# EAGLE board working (EAGLE 9.2.0)
REV: B
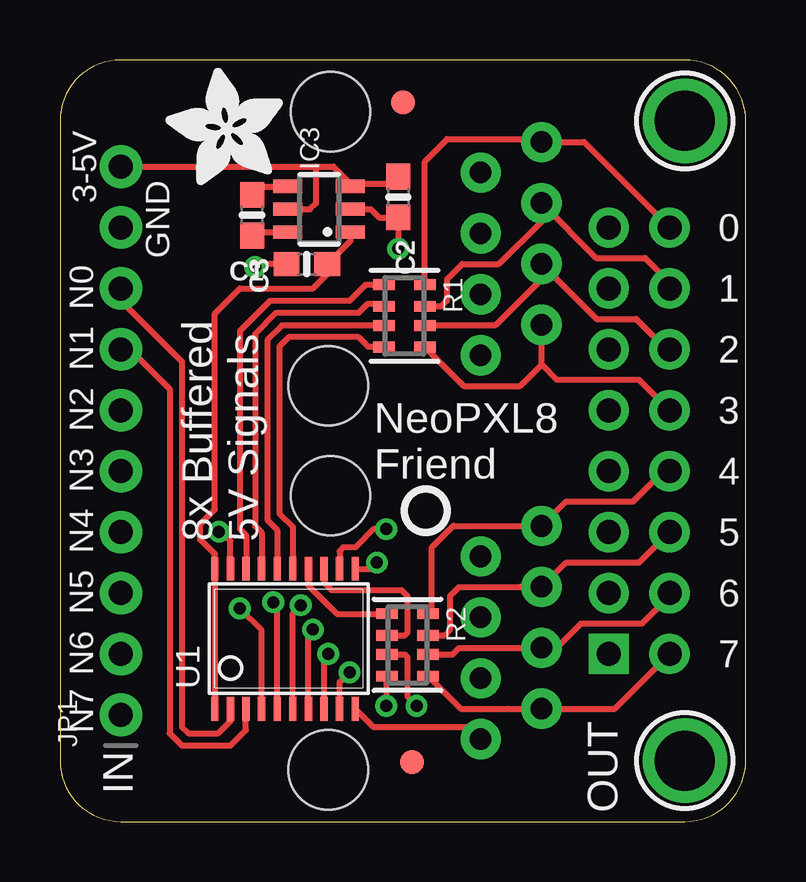
[diagram p0: board, top side]
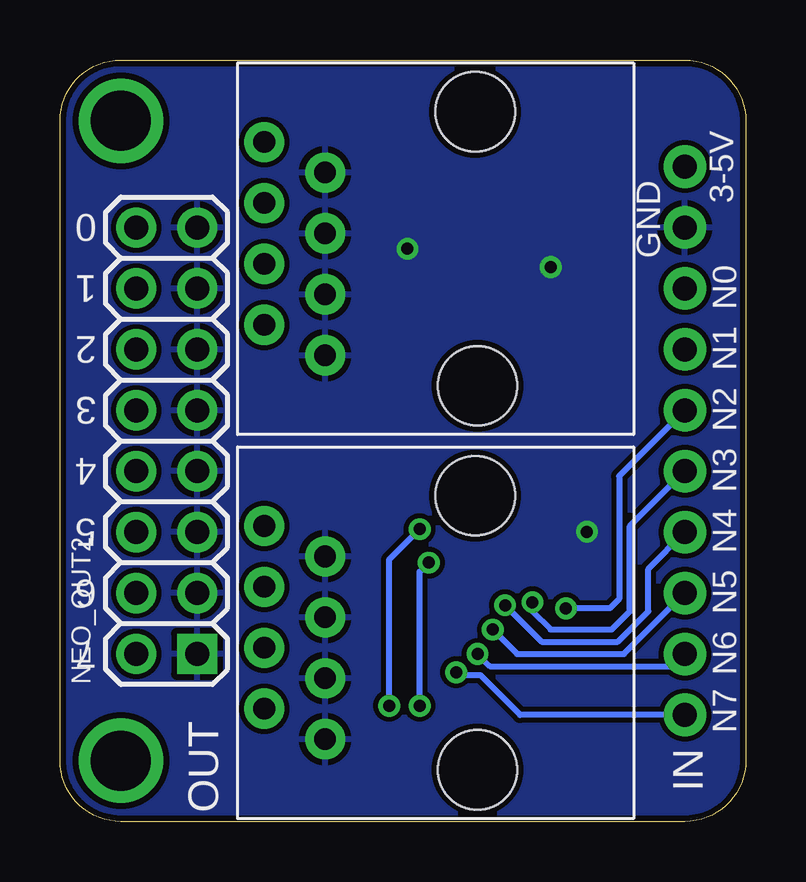
[diagram p1: board, bottom side, seen from below]

Size 28.57 x 31.75 mm. Coordinates in mm from the lower left corner, seen from the top.
Outline: 0,29.21 0,2.54 arc90 2.54,0 26.04,0 arc90 28.57,2.54 28.57,29.21 arc90 26.04,31.75 2.54,31.75 arc90 0,29.21
Copper layers (1*16): Top 0.035mm / dielectric 1.5mm / Bottom 0.035mm
Design rules "adafruit *": minimum track width 8mil, minimum drill 15.5mil, track to track 8mil, track to pad 8mil, pad to pad 8mil, via to via 8mil, smd to smd 8mil, copper to edge 10mil, drill to drill 8mil, minimum pad ring 10mil, minimum via ring 8mil, stop-mask expansion 2mil, vias tented up to drill 20mil, thermal gap 10mil

## Footprints (pad centres in the part's own frame; a part is rotated, then mirrored left to right if it is on the bottom)
0603-NO = smd 1.075 x 1: 1 -0.85,0; 2 0.85,0
RJ45_VERTICAL_UNSHIELDED = drill 0.9 pad 1.676: 1 -4.44,6.35; 2 -3.17,8.89; 3 -1.9,6.35; 4 -0.63,8.89; 5 0.64,6.35; 6 1.91,8.89; 7 3.18,6.35; 8 4.45,8.89 | hole 3.302: -5.715,0; 5.715,0.1
FIDUCIAL_1MM = smd 1 x 1: 1 0,0
SOT23-6 = smd 0.55 x 1.2: 1 -0.95,-1.3; 2 0,-1.3; 3 0.95,-1.3; 4 0.95,1.3; 5 0,1.3; 6 -0.95,1.3
1X10_ROUND70 = drill 1 pad 1.778: 1 -11.43,0; 2 -8.89,0; 3 -6.35,0; 4 -3.81,0; 5 -1.27,0; 6 1.27,0; 7 3.81,0; 8 6.35,0; 9 8.89,0; 10 11.43,0
2X08 = drill 1 pad 1.676 square: 1 -8.89,-1.27 | drill 1 pad 1.676: 2 -8.89,1.27; 3 -6.35,-1.27; 4 -6.35,1.27; 5 -3.81,-1.27; 6 -3.81,1.27; 7 -1.27,-1.27; 8 -1.27,1.27; 9 1.27,-1.27; 10 1.27,1.27; 11 3.81,-1.27; 12 3.81,1.27; 13 6.35,-1.27; 14 6.35,1.27; 15 8.89,-1.27; 16 8.89,1.27
RESPACK_4X0603 = smd 0.45 x 0.9: 1 -1.3,-0.85; 2 -0.4,-0.85; 3 0.4,-0.85; 4 1.3,-0.85; 5 1.3,0.85; 6 0.4,0.85; 7 -0.4,0.85; 8 -1.3,0.85
TSSOP20 = smd 0.305 x 0.991: 1 -3.075,-2.918; 2 -2.425,-2.918; 3 -1.775,-2.918; 4 -1.125,-2.918; 5 -0.475,-2.918; 6 0.175,-2.918; 7 0.825,-2.918; 8 1.475,-2.918; 9 2.125,-2.918; 10 2.775,-2.918; 11 2.775,2.918; 12 2.125,2.918; 13 1.475,2.918; 14 0.825,2.918; 15 0.175,2.918; 16 -0.475,2.918; 17 -1.125,2.918; 18 -1.775,2.918; 19 -2.425,2.918; 20 -3.075,2.918
MOUNTINGHOLE_2.5_PLATED = drill 2.5 pad 3.2: P$1 0,0

## Placement (x,y rotation side)
C1  1uF  [0603-NO]  10.29,23.24 180 top
C2  1uF  [0603-NO]  14.1,26.04 270 top
C3  1uF  [0603-NO]  8,25.27 270 top
CN1  RJ45_V_UNSH  [RJ45_VERTICAL_UNSHIELDED]  11.18,7.87 90 bottom
CN2  RJ45_V_UNSH  [RJ45_VERTICAL_UNSHIELDED]  11.18,23.88 90 bottom
FID1  FIDUCIAL_1MM  [FIDUCIAL_1MM]  14.67,2.48 0 top
FID2  FIDUCIAL_1MM  [FIDUCIAL_1MM]  14.29,29.97 0 top
IC3  AP3602  [SOT23-6]  10.79,25.53 90 top
JP1  [1X10_ROUND70]  2.54,15.88 90 top
NEO_OUT2  [2X08]  24.13,15.88 90 bottom
R1  100  [RESPACK_4X0603]  14.35,21.08 270 top
R2  100  [RESPACK_4X0603]  14.48,7.37 270 top
U1  74HCT245  [TSSOP20]  9.53,7.62 0 top
U$3  MOUNTINGHOLE2.5  [MOUNTINGHOLE_2.5_PLATED]  26.04,29.21 0 top
U$7  MOUNTINGHOLE2.5  [MOUNTINGHOLE_2.5_PLATED]  26.04,2.54 0 top
U$11  [PCBFEAT-REV-040]  15.24,12.95 0 top
U$12  [ADAFRUIT_5MM]  9.27,26.54 90 top

## Library data of the parts
C1-C3 CN1 CN2 IC3 JP1 NEO_OUT2 R1 R2 U1 U$11 U$12 = microbuilder
FID1 FID2 U$3 U$7 = microbuilder; BOM: EXCLUDE

## Nets
3.3V: C2.1 IC3.3 IC3.5 JP1.10
+5V: C1.1 IC3.1 U1.1 U1.20
GND: C1.2 C2.2 CN1.1 CN1.3 CN1.5 CN1.7 CN2.1 CN2.3 CN2.5 CN2.7 IC3.2 JP1.9 NEO_OUT2.1 NEO_OUT2.3 NEO_OUT2.5 NEO_OUT2.7 NEO_OUT2.9 NEO_OUT2.11 NEO_OUT2.13 NEO_OUT2.15 U1.10 U1.19
N$1: R2.4 U1.11
N$2: R2.3 U1.12
N$3: R2.2 U1.13
N$4: R2.1 U1.14
N$5: R1.4 U1.15
N$6: R1.3 U1.16
N$7: R1.2 U1.17
N$8: R1.1 U1.18
N$14: C3.2 IC3.6
N$15: C3.1 IC3.4
NEO_IN0: JP1.8 U1.2
NEO_IN1: JP1.7 U1.3
NEO_IN2: JP1.6 U1.4
NEO_IN3: JP1.5 U1.5
NEO_IN4: JP1.4 U1.6
NEO_IN5: JP1.3 U1.7
NEO_IN6: JP1.2 U1.8
NEO_IN7: JP1.1 U1.9
NEO_OUT0: CN2.8 NEO_OUT2.16 R1.8
NEO_OUT1: CN2.6 NEO_OUT2.14 R1.7
NEO_OUT2: CN2.4 NEO_OUT2.12 R1.6
NEO_OUT3: CN2.2 NEO_OUT2.10 R1.5
NEO_OUT4: CN1.8 NEO_OUT2.8 R2.8
NEO_OUT5: CN1.6 NEO_OUT2.6 R2.7
NEO_OUT6: CN1.4 NEO_OUT2.4 R2.6
NEO_OUT7: CN1.2 NEO_OUT2.2 R2.5

## Tracks (layer width: path | path; a pad name or v marks a point on that pad's centre or on a via)
3.3V
  Top 0.254: JP1.10 10.67,27.3 | 10.67,27.3 11.39,27.3 12.1,26.6 | IC3.5 10.41,25.53 10.67,25.78 10.67,27.3 | 12.1,26.6 IC3.3 | 12.1,26.6 13.82,26.6 C2.1
+5V
  Top 0.254: IC3.1 12.1,24.2 C1.1 11.14,22.82 10.54,22.23 7.49,22.23 6.45,21.18 6.45,13.02 5.84,12.41 5.84,11.76 6.45,11.15 U1.20 U1.1
GND  (via drill 0.5)
  Top 0.254: C1.2 8.26,23.24 v8.13,23.11 | IC3.2 12.95,25.53 13.3,25.18 C2.2 v14.1,23.88 | CN1.1 17.02,3.94 13.06,3.94 U1.10 | U1.19 7.1,11.7 6.73,12.06 6.6,12.06 v6.62,12.08
  pour Bottom: 0,31.75 28.57,31.75 28.57,0 0,0
N$1  (via drill 0.5)
  Top 0.254: R2.4 13.59,6.07 v13.59,4.83 | U1.11 12.95,10.54 v13.21,10.79
  Bottom 0.254: v13.59,4.83 13.59,10.41 v13.21,10.79
N$2  (via drill 0.5)
  Top 0.254: R2.3 14.37,6.97 14.48,6.86 14.48,5.21 v14.86,4.83 | v13.59,12.19 13.08,12.19 12.32,11.43 11.81,11.43 11.65,11.27 U1.12
  Bottom 0.254: v14.86,4.83 14.86,10.92 v13.59,12.19
N$3
  Top 0.254: U1.13 11,9.96 11.3,9.65 14.22,9.65 14.48,9.4 14.48,7.87 14.35,7.75 13.65,7.75 R2.2
N$4
  Top 0.254: U1.14 10.35,9.84 11.53,8.67 R2.1
N$5
  Top 0.254: R1.4 12.86,19.78 12.45,20.19 9.53,20.19 9.14,19.81 9.14,12.83 9.7,12.27 U1.15
N$6
  Top 0.254: R1.3 9.25,20.68 8.64,20.07 8.64,12.57 9.05,12.16 U1.16
N$7
  Top 0.254: R1.2 13.39,21.59 12.83,21.59 12.45,21.21 9.02,21.21 8.13,20.32 8.13,12.32 8.4,12.05 U1.17
N$8
  Top 0.254: R1.1 12.73,22.38 12.06,21.72 8.76,21.72 7.49,20.45 7.49,12.19 7.75,11.94 U1.18
N$14
  Top 0.254: C3.2 8.15,24.58 IC3.6
N$15
  Top 0.254: C3.1 8.36,26.48 IC3.4
NEO_IN0
  Top 0.254: JP1.8 2.54,21.72 5.08,19.18 5.08,3.94 5.33,3.68 6.6,3.68 7.11,4.19 7.11,4.69 U1.2
NEO_IN1
  Top 0.254: JP1.7 2.92,19.68 4.57,18.03 4.57,3.68 5.08,3.17 7.11,3.17 7.75,3.81 U1.3
NEO_IN2  (via drill 0.5)
  Top 0.254: U1.4 8.4,7.98 v7.49,8.89
  Bottom 0.254: JP1.6 5.28,14.4 5.28,9.27 5.66,8.89 v7.49,8.89
NEO_IN3  (via drill 0.5)
  Top 0.254: U1.5 9.05,8.98 v8.89,9.14
  Bottom 0.254: v8.89,9.14 8.89,8.76 8.13,8 5.59,8 4.83,8.76 4.83,12.32 JP1.5
NEO_IN4  (via drill 0.5)
  Top 0.254: U1.6 9.7,8.68 v10.03,9.02
  Bottom 0.254: v10.03,9.02 8.51,7.49 5.33,7.49 4.06,8.76 4.06,10.54 JP1.4
NEO_IN5  (via drill 0.5)
  Top 0.254: U1.7 10.35,7.81 v10.54,8
  Bottom 0.254: v10.54,8 9.53,6.99 5.08,6.99 JP1.3
NEO_IN6  (via drill 0.5)
  Top 0.254: U1.8 11,6.81 v11.18,6.99
  Bottom 0.254: v11.18,6.99 10.67,6.48 3.05,6.48 JP1.2
NEO_IN7  (via drill 0.5)
  Top 0.254: U1.9 11.65,5.81 v12.06,6.22
  Bottom 0.254: JP1.1 9.4,4.45 11.05,6.1 11.94,6.1 v12.06,6.22
NEO_OUT0
  Top 0.254: R1.8 15.2,27.52 16.13,28.45 19.94,28.45 CN2.8 21.84,28.33 NEO_OUT2.16
NEO_OUT1
  Top 0.254: NEO_OUT2.14 25.65,22.23 24.38,23.5 22.35,23.5 CN2.6 20.07,25.02 18.29,23.24 16.76,23.24 16.13,22.61 16.13,21.72 15.89,21.48 R1.7
NEO_OUT2
  Top 0.254: NEO_OUT2.12 25.27,19.68 24,20.95 22.36,20.95 CN2.4 20.07,22.61 18.16,20.7 15.22,20.7 R1.6
NEO_OUT3
  Top 0.254: R1.5 16.82,18.16 19.18,18.16 20.07,19.05 | 20.07,19.05 CN2.2 | NEO_OUT2.10 24.13,18.41 20.7,18.41 20.07,19.05
NEO_OUT4
  Top 0.254: NEO_OUT2.8 25.15,14.61 23.88,13.34 21.08,13.34 CN1.8 16.39,12.32 15.49,11.43 15.49,8.83 R2.8
NEO_OUT5
  Top 0.254: NEO_OUT2.6 24.13,10.79 21.08,10.79 CN1.6 19.18,9.78 16.64,9.78 16.26,9.4 16.26,8 16.02,7.77 R2.7
NEO_OUT6
  Top 0.254: NEO_OUT2.4 25.53,9.53 24.26,8.26 21.72,8.26 20.71,7.24 CN1.4 16.64,7.24 16.36,6.97 R2.6
NEO_OUT7
  Top 0.254: NEO_OUT2.2 23.12,4.7 CN1.2 18.67,4.7 16.7,4.7 R2.5

## Text on the board
tPlace: 3-5V | 0 | GND | 1 | N0 | 2 | N1 | 3 | N2 | NeoPXL8 / Friend | 4 | N3 | 8x Buffered / 5V Signals | 5 | N4 | 6 | N5 | 7 | N6 | N7 | OUT | IN
bPlace: 3-5V | 0 | GND | 1 | N0 | 2 | N1 | 3 | N2 | 4 | N3 | 5 | N4 | 6 | N5 | 7 | N6 | N7 | OUT | IN